# EAGLE board Project_02 (EAGLE 9.6.2)
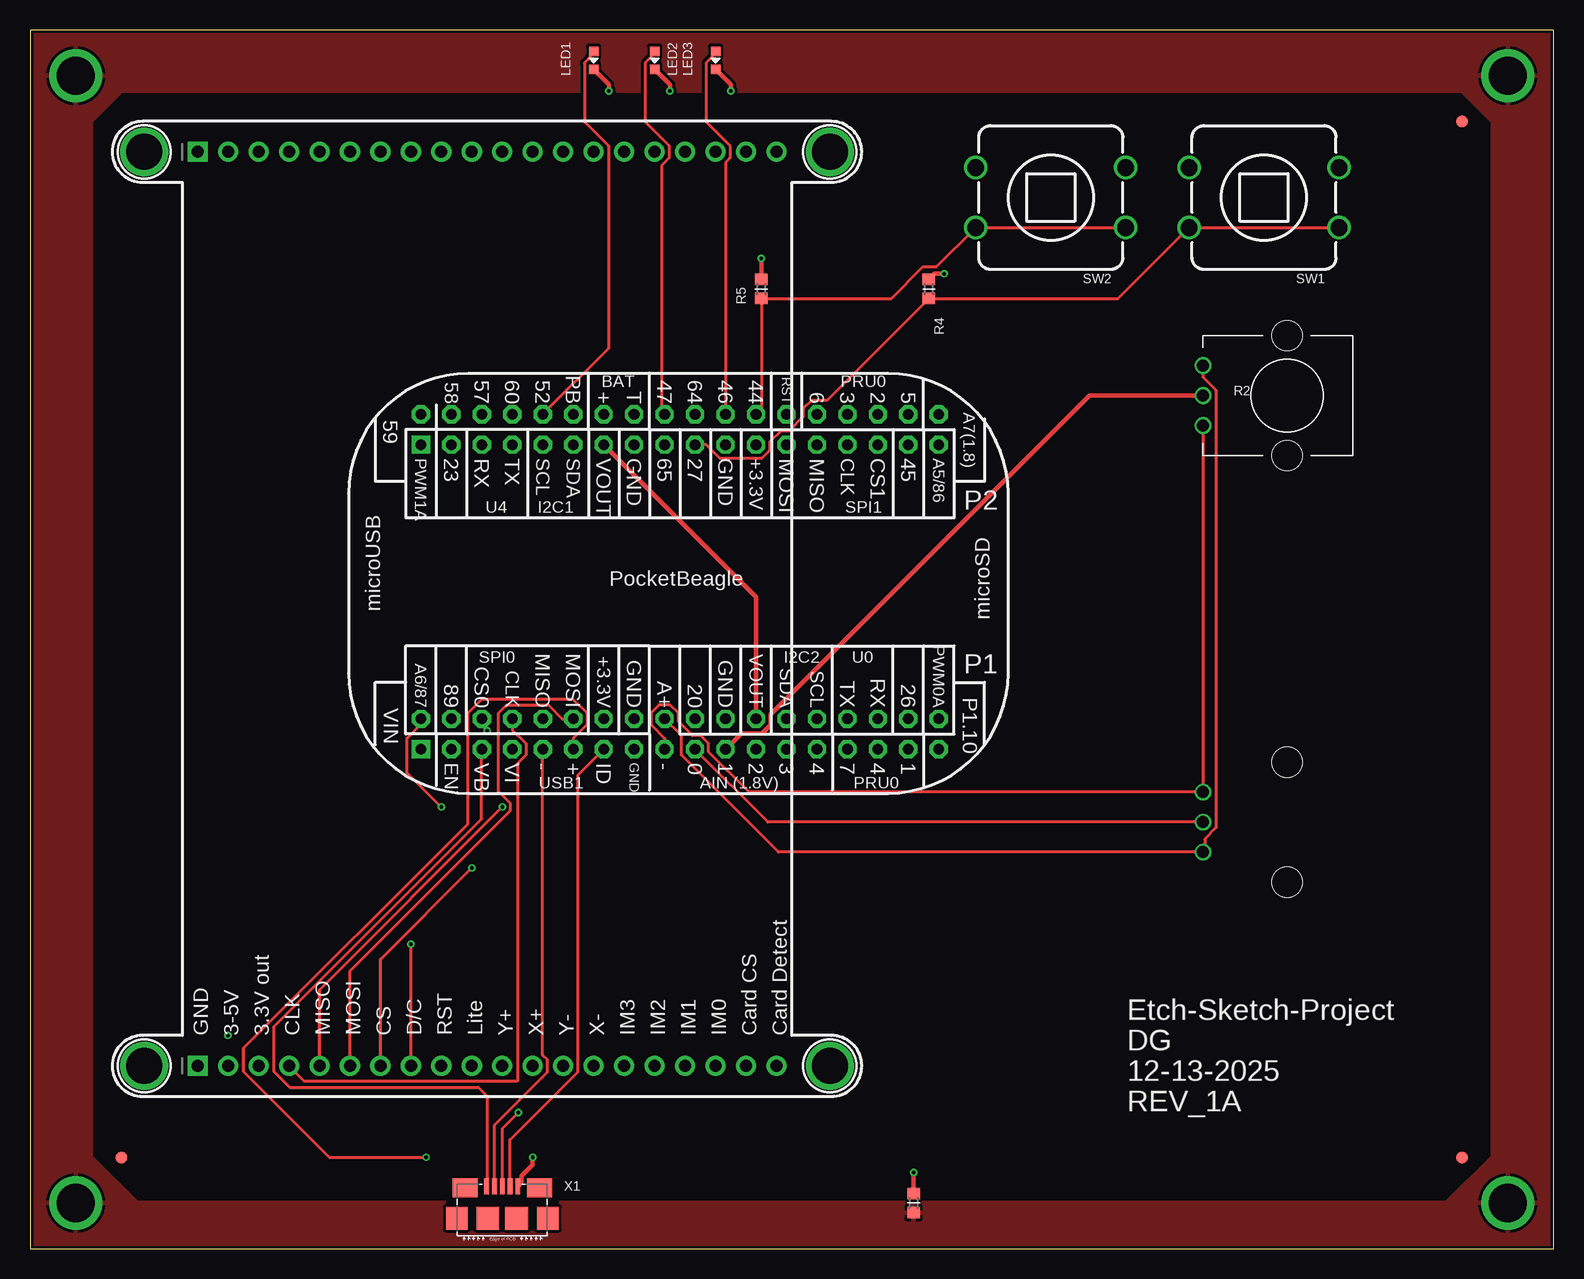
[diagram p0: board, top side]
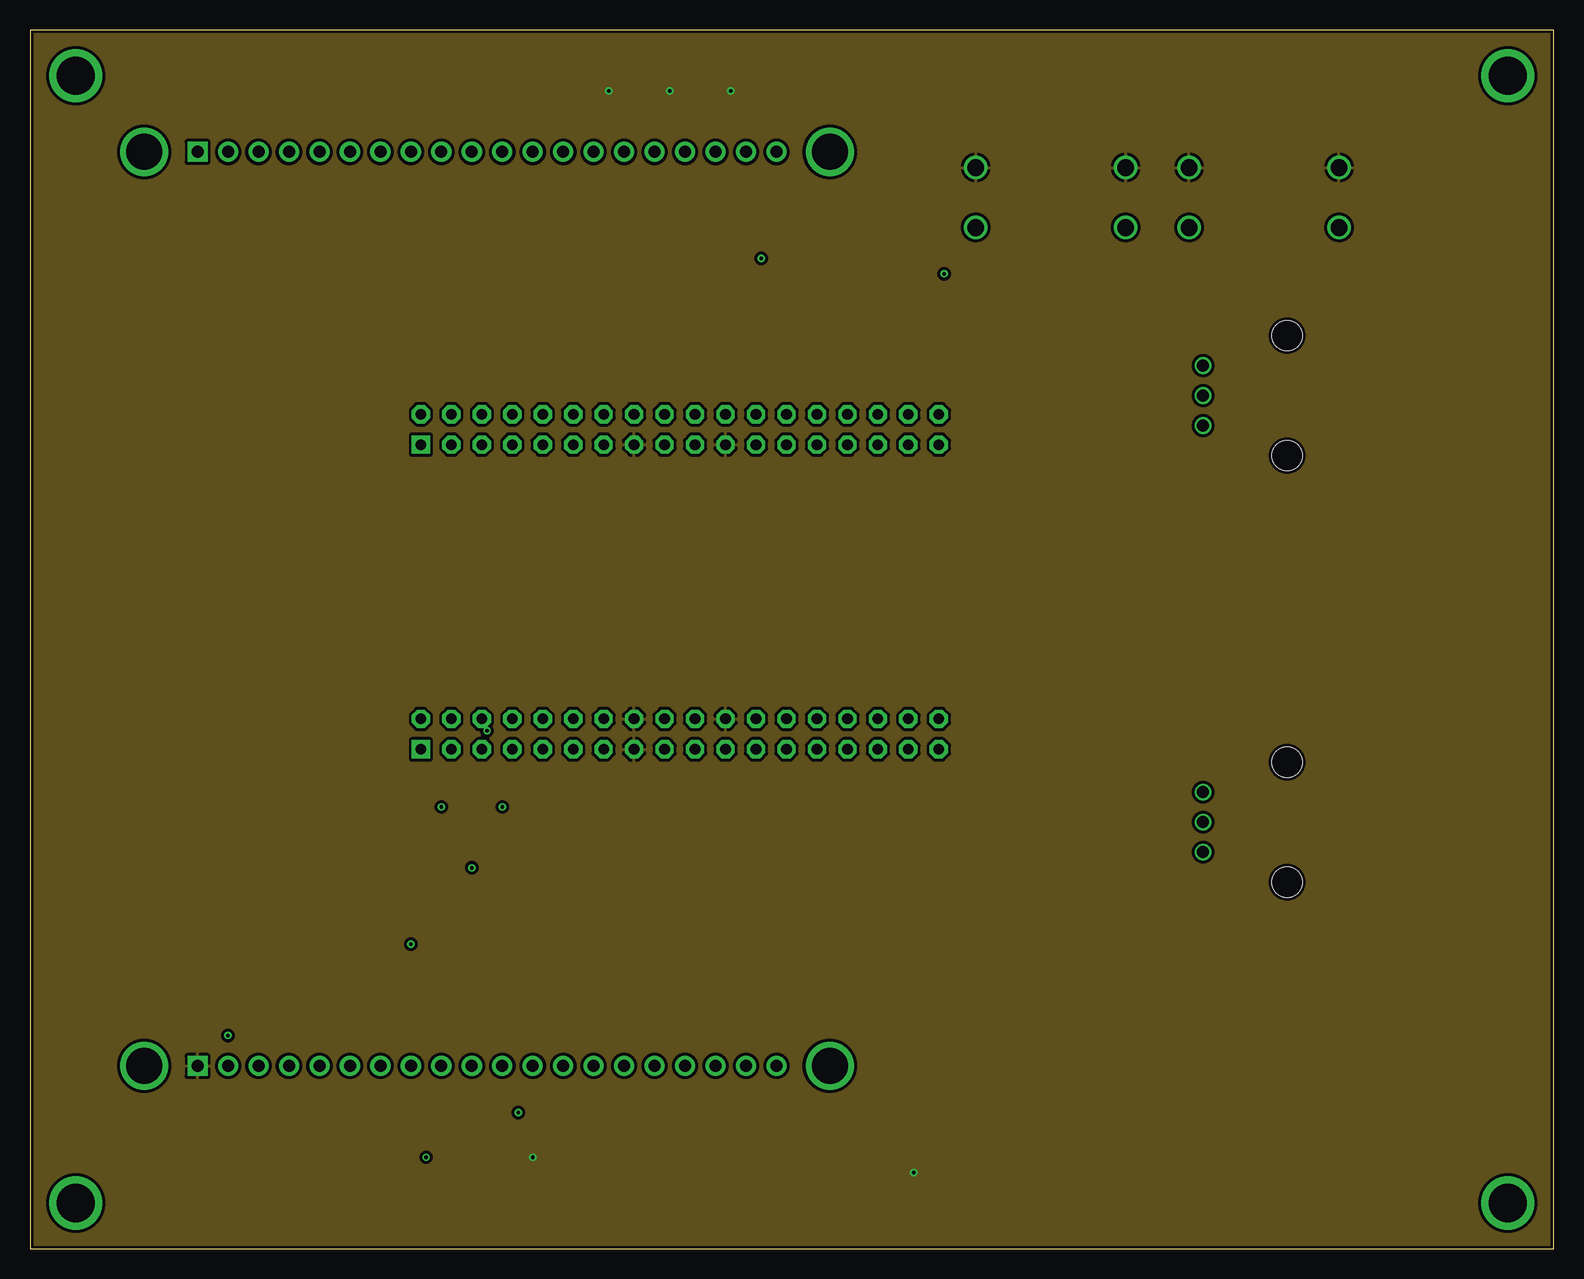
[diagram p1: board, inner layer Route2]
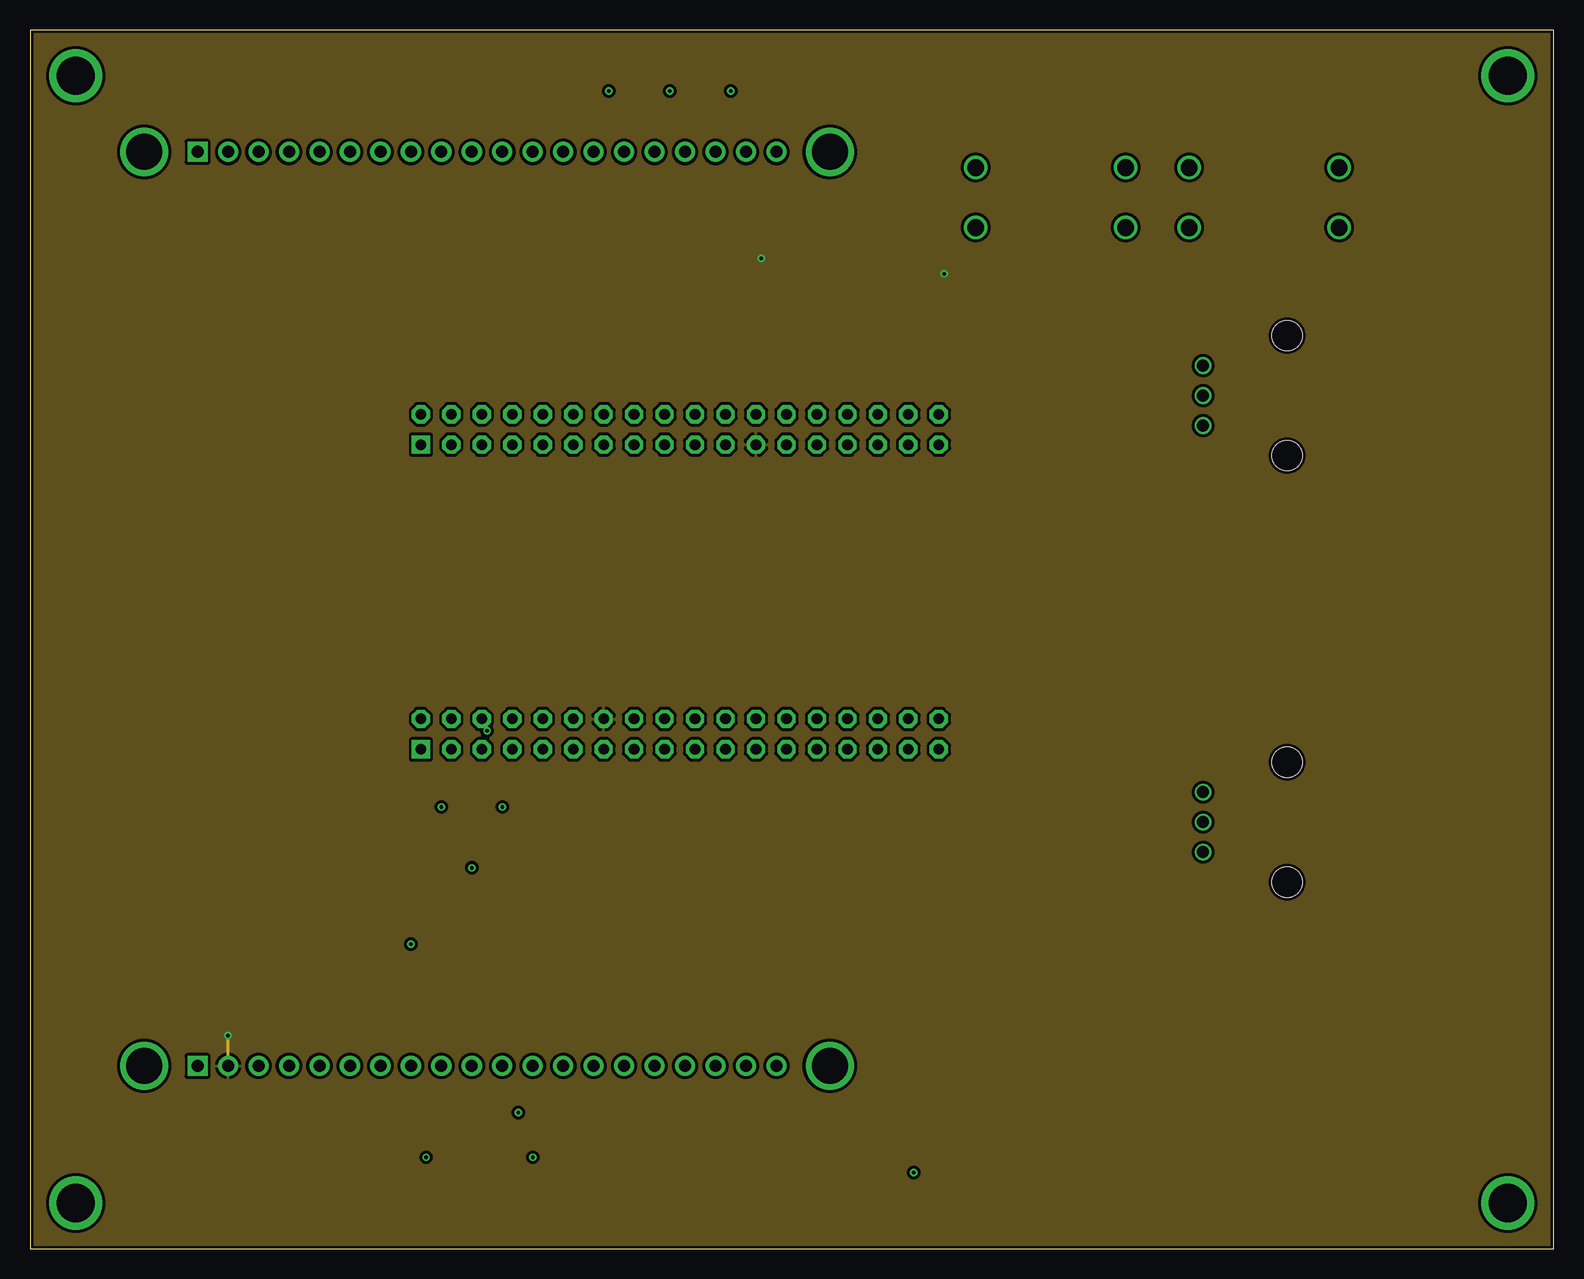
[diagram p2: board, inner layer Route15]
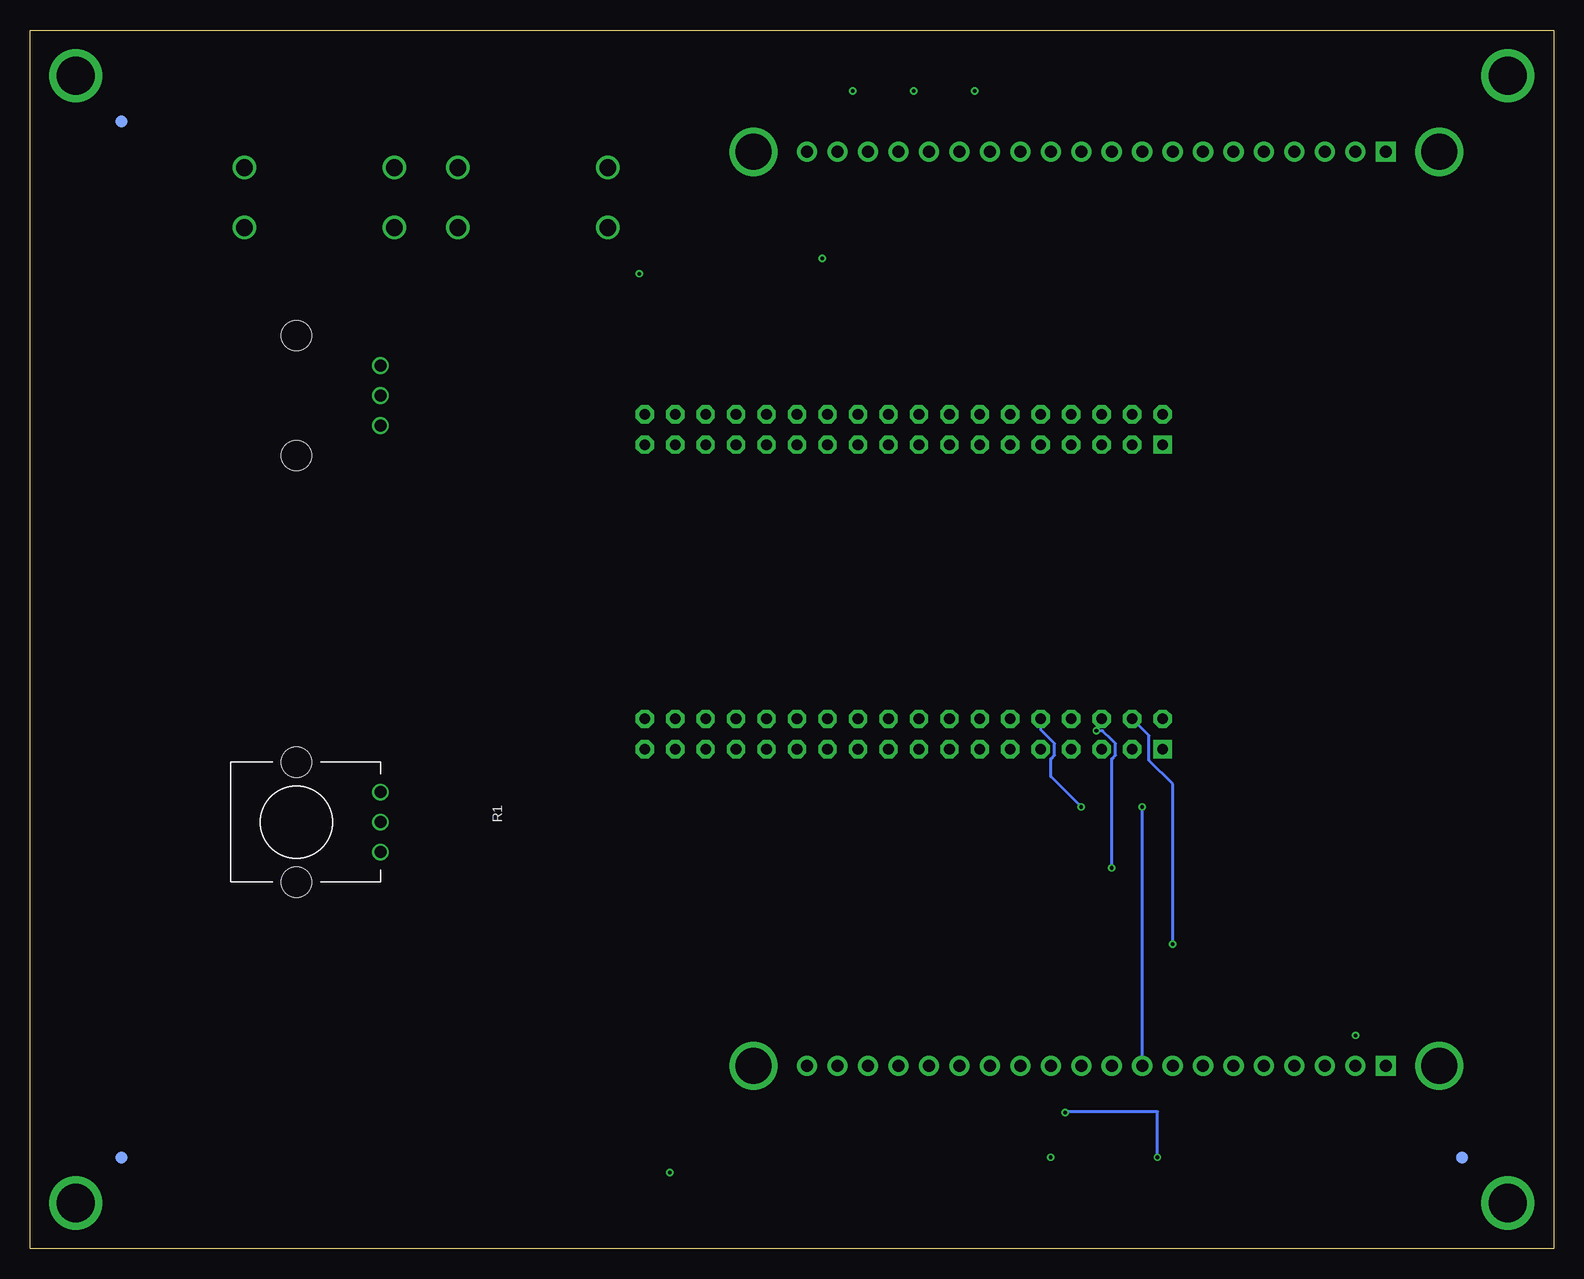
[diagram p3: board, bottom side, seen from below]

Size 127 x 101.6 mm. Coordinates in mm from the lower left corner, seen from the top.
Outline: 0,0 127,0 127,101.6 0,101.6 0,0
Copper layers (1*2*15*16): Top 0.035mm / dielectric 0.23mm / Route2 0.035mm / dielectric 0.93mm / Route15 0.035mm / dielectric 0.23mm / Bottom 0.035mm
Design rules "EDES301_4lyr": minimum track width 10mil, minimum drill 12mil, track to track 10mil, track to pad 10mil, pad to pad 10mil, via to via 10mil, smd to smd 10mil, copper to edge 10mil, drill to drill 12mil, minimum pad ring 6mil, minimum via ring 6mil, stop-mask expansion 3mil, vias tented up to drill 25mil, thermal gap 10mil

## Footprints (pad centres in the part's own frame; a part is rotated, then mirrored left to right if it is on the bottom)
FIDUCIAL_40MIL = smd 1.016 x 1.016: P$1 0,0
0603-LED = smd 0.8 x 0.8: A 0,0.75; K 0,-0.75
MOUNTING_HOLE = drill 3.175 pad 4.445: P$1 0,0
POT-PO90S = drill 1: CCW -2.5,0; CW 2.5,0; S 0,0 | hole 2.5: -5,7; 5,7
R0603 = smd 0.95 x 1.031: 1 -0.8,0; 2 0.8,0
BUTTON_12.5MM = drill 1.4: 1 -6.25,2.5; 2 -6.25,-2.5; 3 6.25,2.5; 4 6.25,-2.5
POCKETBEAGLE = drill 0.889 pad 1.524 square: P1_01 5.91,3.53; P2_01 5.91,28.93 | drill 0.889 pad 1.524 octagon: P1_02 5.91,6.07; P1_03 8.45,3.53; P1_04 8.45,6.07; P1_05 10.99,3.53; P1_06 10.99,6.07; P1_07 13.53,3.53; P1_08 13.53,6.07; P1_09 16.07,3.53; P1_10 16.07,6.07; P1_11 18.61,3.53; P1_12 18.61,6.07; P1_13 21.15,3.53; P1_14 21.15,6.07; P1_15 23.69,3.53; P1_16 23.69,6.07; P1_17 26.23,3.53; P1_18 26.23,6.07; P1_19 28.77,3.53; P1_20 28.77,6.07; P1_21 31.31,3.53; P1_22 31.31,6.07; P1_23 33.85,3.53; P1_24 33.85,6.07; P1_25 36.39,3.53; P1_26 36.39,6.07; P1_27 38.93,3.53; P1_28 38.93,6.07; P1_29 41.47,3.53; P1_30 41.47,6.07; P1_31 44.01,3.53; P1_32 44.01,6.07; P1_33 46.55,3.53; P1_34 46.55,6.07; P1_35 49.09,3.53; P1_36 49.09,6.07; P2_02 5.91,31.47; P2_03 8.45,28.93; P2_04 8.45,31.47; P2_05 10.99,28.93; P2_06 10.99,31.47; P2_07 13.53,28.93; P2_08 13.53,31.47; P2_09 16.07,28.93; P2_10 16.07,31.47; P2_11 18.61,28.93; P2_12 18.61,31.47; P2_13 21.15,28.93; P2_14 21.15,31.47; P2_15 23.69,28.93; P2_16 23.69,31.47; P2_17 26.23,28.93; P2_18 26.23,31.47; P2_19 28.77,28.93; P2_20 28.77,31.47; P2_21 31.31,28.93; P2_22 31.31,31.47; P2_23 33.85,28.93; P2_24 33.85,31.47; P2_25 36.39,28.93; P2_26 36.39,31.47; P2_27 38.93,28.93; P2_28 38.93,31.47; P2_29 41.47,28.93; P2_30 41.47,31.47; P2_31 44.01,28.93; P2_32 44.01,31.47; P2_33 46.55,28.93; P2_34 46.55,31.47; P2_35 49.09,28.93; P2_36 49.09,31.47
ADAFRUIT-2.8-TFT-SPI-SCREEN = drill 1 pad 1.676 square: 1@JP1 -24.13,38.1; GND -24.13,-38.1 | drill 1 pad 1.676: 2@JP1 -21.59,38.1; 3@JP1 -19.05,38.1; 3@JP2 -19.05,-38.1; 4@JP1 -16.51,38.1; 5@JP1 -13.97,38.1; 6@JP1 -11.43,38.1; 7@JP1 -8.89,38.1; 8@JP1 -6.35,38.1; 9@JP1 -3.81,38.1; 10@JP1 -1.27,38.1; 10@JP2 -1.27,-38.1; 11@JP1 1.27,38.1; 11@JP2 1.27,-38.1; 12@JP1 3.81,38.1; 12@JP2 3.81,-38.1; 13@JP1 6.35,38.1; 13@JP2 6.35,-38.1; 14@JP1 8.89,38.1; 14@JP2 8.89,-38.1; 15@JP1 11.43,38.1; 15@JP2 11.43,-38.1; 16@JP1 13.97,38.1; 16@JP2 13.97,-38.1; 17@JP1 16.51,38.1; 17@JP2 16.51,-38.1; 18@JP1 19.05,38.1; 18@JP2 19.05,-38.1; 19@JP1 21.59,38.1; 19@JP2 21.59,-38.1; 20@JP1 24.13,38.1; 20@JP2 24.13,-38.1; CLK -16.51,-38.1; CS\ -8.89,-38.1; D/C -6.35,-38.1; MISO -13.97,-38.1; MOSI -11.43,-38.1; RST -3.81,-38.1; VIN -21.59,-38.1 | drill 3 pad 3.6: P$1@U$7 -28.575,-38.1; P$1@U$15 28.575,-38.1; P$1@U$16 -28.575,38.1; P$1@U$17 28.575,38.1
10118192-0001LF(MICRO-USB-B-AMPHENOL-FCI) = smd 1.8 x 1.9: CGND1 -3.8,0; CGND4 3.8,0 | smd 1.9 x 1.9: CGND2 -1.2,0; CGND3 1.2,0 | smd 2.1 x 1.6: CGND5 3.1,2.55; CGND6 -3.1,2.55 | smd 0.4 x 1.35: D+ 0,2.675; D- -0.65,2.675; GND 1.3,2.675; ID 0.65,2.675; VBUS -1.3,2.675

## Placement (x,y rotation side)
FUD1  FIDUCIAL  [FIDUCIAL_40MIL]  119.38,93.98 0 top
FUD2  FIDUCIAL  [FIDUCIAL_40MIL]  119.38,93.98 90 bottom
FUD3  FIDUCIAL  [FIDUCIAL_40MIL]  7.62,7.62 0 bottom
FUD4  FIDUCIAL  [FIDUCIAL_40MIL]  119.38,7.62 0 bottom
FUD5  FIDUCIAL  [FIDUCIAL_40MIL]  7.62,7.62 0 top
FUD6  FIDUCIAL  [FIDUCIAL_40MIL]  119.38,7.62 0 top
LED1  [0603-LED]  46.99,99.06 0 top
LED2  [0603-LED]  52.07,99.06 0 top
LED3  [0603-LED]  57.15,99.06 0 top
MGT1  MOUNTING_HOLE  [MOUNTING_HOLE]  3.81,97.79 0 top
MGT2  MOUNTING_HOLE  [MOUNTING_HOLE]  123.19,97.79 0 top
MGT3  MOUNTING_HOLE  [MOUNTING_HOLE]  123.19,3.81 0 top
MGT4  MOUNTING_HOLE  [MOUNTING_HOLE]  3.81,3.81 0 top
R1  POTENTIOMETER  [POT-PO90S]  97.79,35.56 90 bottom
R2  POTENTIOMETER  [POT-PO90S]  97.79,71.12 270 top
R3  1K  [R0603]  73.66,3.81 270 top
R4  1K  [R0603]  74.93,80.01 90 top
R5  1K  [R0603]  60.96,80.01 90 top
SW1  PUSH_BUTTON  [BUTTON_12.5MM]  102.87,87.63 180 top
SW2  PUSH_BUTTON  [BUTTON_12.5MM]  85.09,87.63 180 top
U1  POCKETBEAGLE  [POCKETBEAGLE]  26.67,38.1 0 top
U2  SPI_SCREEN  [ADAFRUIT-2.8-TFT-SPI-SCREEN]  38.1,53.34 0 top
X1  [10118192-0001LF(MICRO-USB-B-AMPHENOL-FCI)]  39.37,2.54 0 top

## Library data of the parts
FUD1-FUD6 LED1-LED3 MGT1-MGT4 R1-R5 SW1 SW2 U1 U2 X1 = Project_02

## Nets
AGND: R1.CW R2.CW U1.P1_17
BAT.VIN: U1.P2_14
BLUE_LED: LED3.A U1.P2_22
BUTTON_1: R4.1 SW1.1 SW1.3 U1.P2_19
BUTTON_2: R5.1 SW2.1 SW2.3 U1.P2_24
CGND: MGT1.P$1 MGT2.P$1 MGT3.P$1 MGT4.P$1 R3.2
CLK: U1.P1_08 U2.CLK
CS: U1.P1_06 U2.CS\
D+: U1.P1_11 X1.D+
D-: U1.P1_09 X1.D-
D/C: U1.P1_04 U2.D/C
GND: LED1.K LED2.K LED3.K R3.1 SW1.2 SW1.4 SW2.2 SW2.4 U1.P1_15 U1.P1_16 U1.P1_22 U1.P2_15 U1.P2_21 U2.GND X1.GND
GREEN_LED: LED2.A U1.P2_18
ID: U1.P1_13 X1.ID
MISO: U1.P1_10 U2.MISO
MOSI: U1.P1_12 U2.MOSI
POT_1: R1.S U1.P1_19
POT_2: R2.S U1.P1_21
RED_LED: LED1.A U1.P2_10
RST: U1.P1_02 U2.RST
VBUS: U1.P1_05 X1.VBUS
VDD_1P8V: R1.CCW R2.CCW U1.P1_18
VDD_3P3V: R4.2 R5.2 U1.P1_14 U1.P2_23 U2.VIN
VIN: U1.P1_01
VOUT: U1.P1_24 U1.P2_13

## Tracks (layer width: path | path; a pad name or v marks a point on that pad's centre or on a via)
AGND
  Top 0.254: R2.CW R1.CW 59.93,38.06 56.58,41.41 56.58,42.1 55.91,42.77 55.22,42.77 54.04,43.95 54.04,44.64 53.37,45.31 52.43,45.31 51.76,44.64 51.76,43.7 52.9,42.55 U1.P1_17
BLUE_LED
  Top 0.254: LED3.A 57.15,99.65 56.37,98.87 56.37,93.94 58.37,91.94 58.37,90.94 57.98,90.55 U1.P2_22
BUTTON_1
  Top 0.254: U1.P2_19 56.36,67.03 57.51,65.89 60.99,65.89 61.66,66.56 61.66,67.25 62.59,68.17 63.28,68.17 64.46,69.35 64.46,70.04 65.13,70.71 66.43,70.71 R4.1 90.7,79.21 SW1.3 SW1.1
BUTTON_2
  Top 0.254: U1.P2_24 60.96,70.01 R5.1 71.8,79.21 74.44,81.85 75.56,81.85 SW2.3 SW2.1
CGND
  pour Top: -2.54,50.8 5.08,43.18 5.08,7.62 8.89,3.81 118.11,3.81 121.92,7.62 121.92,50.8 129.54,50.8 129.54,-2.54 -2.54,-2.54
  pour Top: -2.54,50.8 5.08,43.18 5.08,91.44 5.08,93.98 7.62,96.52 116.84,96.52 119.38,96.52 121.92,93.98 121.92,50.8 129.54,50.8 129.54,101.6 -2.54,101.6
CLK
  Top 0.254: U1.P1_08 40.2,43.25 41.34,42.1 41.34,41.16 40.64,40.45 40.64,13.97 22.86,13.97 U2.CLK
CS  (via drill 0.3)
  Top 0.254: U2.CS\ 29.21,24.13 v36.83,31.75 | v38.1,43.18 37.66,43.62 U1.P1_06
  Bottom 0.254: v36.83,31.75 36.83,40.84 36.52,41.16 36.52,42.1 36.58,42.16 36.83,42.42 37.59,43.18 v38.1,43.18
D+  (via drill 0.3)
  Top 0.254: U1.P1_11 45.28,42.55 46.42,43.7 46.42,44.64 45.24,45.82 37.7,45.82 36.52,44.64 36.52,35.41 17.83,16.73 17.83,14.73 24.95,7.62 v33.02,7.62 | v40.72,11.35 39.37,10.01 X1.D+
  Bottom 0.254: v33.02,7.62 33.02,11.43 40.64,11.43 v40.72,11.35
D-
  Top 0.254: X1.D- 38.72,10.33 43.13,14.73 43.13,15.74 42.74,16.13 U1.P1_09
D/C  (via drill 0.3)
  Top 0.254: U2.D/C v31.75,25.4
  Bottom 0.254: v31.75,25.4 31.75,38.74 33.72,40.71 33.72,42.77 U1.P1_04
GND  (via drill 0.3)
  Top 0.381: LED1.K 48.26,97.04 v48.26,96.52 | LED2.K 53.34,97.04 v53.34,96.52 | LED3.K 58.42,97.04 v58.42,96.52 | R3.1 v73.66,6.35 | X1.GND 40.98,5.52 40.98,6.07 41.91,7.01 v41.91,7.62
  pour Route2: -7.62,-2.54 -7.62,104.14 132.08,104.14 132.08,-5.08 -7.62,-5.08
GREEN_LED
  Top 0.254: LED2.A 52.07,99.65 51.29,98.87 51.29,93.94 53.29,91.94 53.29,90.94 52.65,90.3 52.65,69.82 U1.P2_18
ID
  Top 0.254: X1.ID 40.02,9.09 45.67,14.73 45.67,39.48 U1.P1_13
MISO  (via drill 0.3)
  Top 0.254: U2.MISO 24.13,21.59 v39.37,36.83
  Bottom 0.254: v39.37,36.83 41.91,39.37 41.91,40.84 41.6,41.16 41.6,42.1 42.74,43.25 U1.P1_10
MOSI
  Top 0.254: U2.MOSI 26.67,23.16 40.06,36.55 40.06,37.11 39.06,38.11 39.06,44.64 39.73,45.31 43.21,45.31 44.36,44.17 U1.P1_12
POT_1
  Top 0.254: R1.S 61.51,35.56 U1.P1_19
POT_2
  Top 0.381: U1.P1_21 59.31,42.96 61.02,42.96 61.73,43.67 61.73,44.54 88.3,71.12 R2.S
RED_LED
  Top 0.254: LED1.A 46.99,99.65 46.21,98.87 46.21,93.94 48.21,91.94 48.21,75.04 U1.P2_10
RST  (via drill 0.3)
  Top 0.254: U1.P1_02 32.58,43.69 31.44,42.55 31.44,39.68 v34.29,36.83
  Bottom 0.254: U2.RST v34.29,36.83
VBUS
  Top 0.254: U1.P1_05 37.66,35.84 20.37,18.55 20.37,14.73 21.64,13.46 37.34,13.46 38.1,12.7 38.1,5.25 X1.VBUS
VDD_1P8V
  Top 0.254: R2.CCW 97.79,72.65 98.87,71.57 98.87,35.11 97.92,34.16 97.92,33.19 R1.CCW 62.39,33.06 54.3,41.16 54.3,42.77 U1.P1_18
VDD_3P3V  (via drill 0.3)
  Top 0.381: R4.2 75.4,81.28 v76.2,81.28 | R5.2 v60.96,82.55
  Route15 0.254: U2.VIN v16.51,17.78
  pour Route15: -12.7,-5.08 -12.7,109.22 139.7,109.22 139.7,-10.16 -12.7,-10.16
VOUT
  Top 0.381: U1.P2_13 60.52,54.33 U1.P1_24

## Text on the board
tNames: Etch-Sketch-Project | DG | 12-13-2025 | REV_1A